# Altium PCB 集成板lite.PcbDoc
Units mil, origin at the board's own origin, x right, y up, seen from the top; angles counter-clockwise.
Board outline 6000 x 4000 mil, 2 copper layers (Top Layer, Bottom Layer); 36 components, 32 nets, 165 pads, 0 vias.
Unrouted connection lines stored in the file: 102.
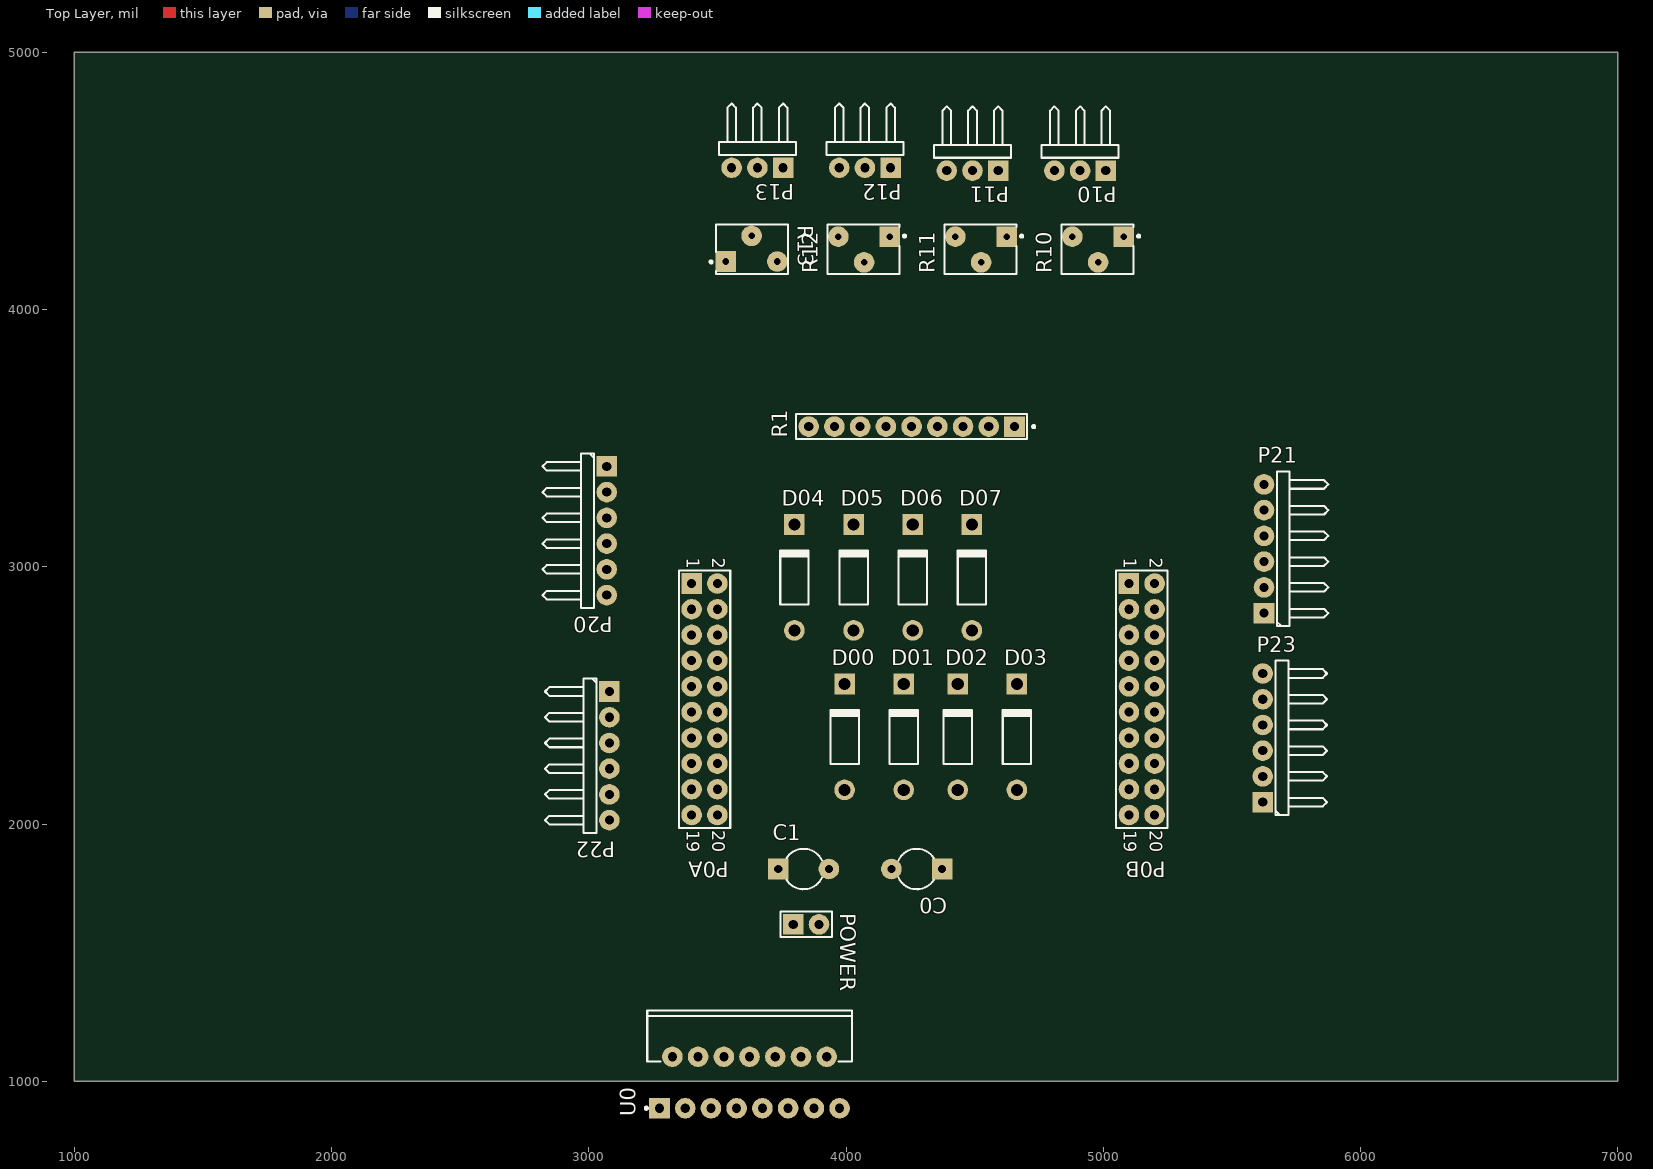
[diagram p0: Top Layer view]
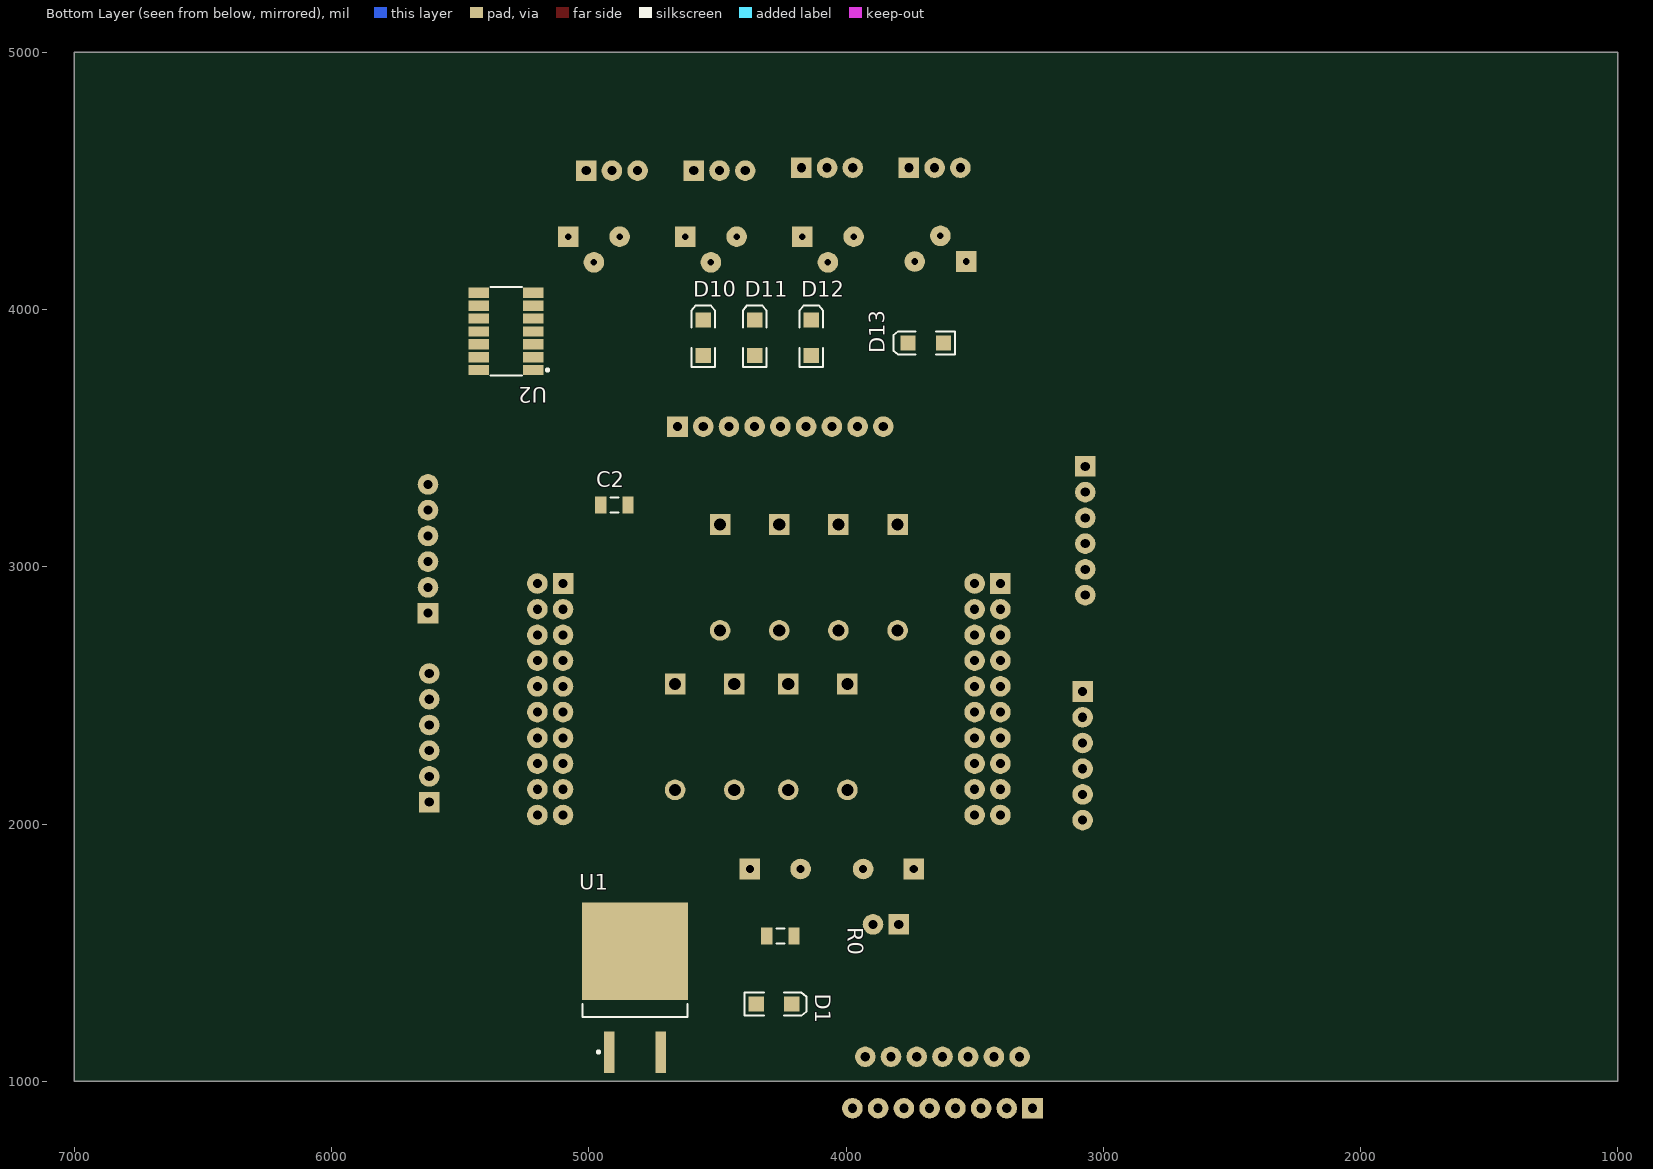
[diagram p1: Bottom Layer view, seen from below]

## Layer stack, top to bottom
Top Solder: solder mask 0.4, Solder Resist, Dk 3.5
Top Layer: signal copper 1.4
Dielectric 1: dielectric 12.6, FR-4, Dk 4.8
Bottom Layer: signal copper 1.4
Bottom Solder: solder mask 0.4, Solder Resist, Dk 3.5

## Board outline
1000,1000 7000,1000 7000,5000 1000,5000

## Design rules (kind name [scope] priority, off if disabled: settings)
Clearance [All] p1: gap=10 ignorepadtopadclearanceinfootprint=FALSE except(0: Arc-Hole Track-Hole SMDPad-Hole THPad-Hole Via-Hole Fill-Hole Poly-Hole Region-Hole Text-Hole)
PolygonConnect [All] p1: connectstyle=Relief reliefconductorwidth=10 reliefentries=4 polygonreliefangle="90 Angle" airgapwidth=10
RoutingLayers [All] p1: top layer_v5=FALSE bottom layer_v5=TRUE
RoutingVias [All] p1: holewidth=28 width=50 viastyle="Through Hole" minholewidth=28 minwidth=50 maxholewidth=28 maxwidth=50
SolderMaskExpansion [All] p1: expansion=4 istentingtop=FALSE
Width [All] p1: maxlimit=50 minlimit=40 preferedwidth=45
29 further rules are at their usual default settings.

## Classes and differential pairs
component class 集成板lite: C0 C1 D00 D01 D1 D02 D03 D04 D05 D06 D07 P0A P0B P10 P11 P12 P13 P20 P21 P22 P23 POWER R0 R10 R11 R12 R13 U0 U1

## Components (designator, comment, footprint, x,y, rotation, side; value= is the part's Value field where it differs from the comment)
C0 "Cap2" CAPR5-4X5 4275,1825 r180 top value=220uF
C1 "Cap2" CAPR5-4X5 3835,1825 r0 top value=220uF
C2 "Cap Semi" C1206 4900,3240 r180 bottom value=100pF
D00 "Diode 1N4007" DO-41 3994.5,2338.46 r90 top
D1 "LED2" 3.2X1.6X1.1 4280,1300 r180 bottom
D01 "Diode 1N4007" DO-41 4224.5,2338.46 r90 top
D02 "Diode 1N4007" DO-41 4434.5,2338.46 r90 top
D03 "Diode 1N4007" DO-41 4664.5,2338.46 r90 top
D04 "Diode 1N4007" DO-41 3799.5,2958.46 r90 top
D05 "Diode 1N4007" DO-41 4029.5,2958.46 r90 top
D06 "Diode 1N4007" DO-41 4259.5,2958.46 r90 top
D07 "Diode 1N4007" DO-41 4489.5,2958.46 r90 top
D10 "LED2" 3.2X1.6X1.1 4555,3890 r90 bottom
D11 "LED2" 3.2X1.6X1.1 4355,3890 r90 bottom
D12 "LED2" 3.2X1.6X1.1 4135,3890 r90 bottom
D13 "LED2" 3.2X1.6X1.1 3690,3870 r0 bottom
P0A "Header 10X2" HDR2X10 3400,2935 r270 top locked
P0B "Header 10X2" HDR2X10 5100,2935 r270 top locked
P10 "Header 3H" HDR1X3H 5010,4540 r180 top
P11 "Header 3H" HDR1X3H 4591.83,4540 r180 top
P12 "Header 3H" HDR1X3H 4173.67,4551.06 r180 top
P13 "Header 3H" HDR1X3H 3755.5,4551.06 r180 top
P20 "Header 6H" HDR1X6H 3070,3390 r270 top
P21 "Header 6H" HDR1X6H 5625,2820 r90 top
P22 "Header 6H" HDR1X6H 3080,2515 r270 top
P23 "Header 6H" HDR1X6H 5620,2085 r90 top
POWER "Header 2" HDR1X2 3795,1610 r0 top
R0 "Res2" C1206 4255,1565 r180 bottom value=1K
R1 "4609X-101-103LF" BOUR-4609X 4255,3545 r180 top
R10 "3266W-1-103LF" FP-3266W-MFG 4977.83,4235 r180 top value=10kΩ
R11 "3266W-1-103LF" FP-3266W-MFG 4522.94,4235 r180 top value=10kΩ
R12 "3266W-1-103LF" FP-3266W-MFG 4068.04,4235 r180 top value=10kΩ
R13 "3266W-1-103LF" FP-3266W-MFG 3635,4235 r0 top value=10kΩ
U0 "L298N" STM-FM-15 3625,995 r90 top
U1 "L7805CD2T-TR" TO-263_M 4820,1363.27 r90 bottom
U2 "LM339DR" FP-D0014A-MFG 5321.3,3915 r0 bottom

## Footprints (in the part's own frame and the unit in brackets; to place one, negate y for a bottom-side part, rotate by r counter-clockwise, add the part's x,y. Pads: shape width x height; smd on the part's side, far side on the other; paste and mask are expansions set on the pad)
3.2X1.6X1.1 [mm] "SMT LED; 2 Flat Leads"
  rect 1.5x1.5 smd: 1(-1.75,0) 2(1.75,0)
  silkscreen extent -2.9,-1.15 3.2,1.15
BOUR-4609X [mil] "THD, 9-Leads, Body 22.81x2.49mm, Pitch 2.54mm"
  rect 80x80 hole 35.43 mask+4: 1(-400,0)
  round 80 hole 35.43 mask+4: 2(-300,0) 3(-200,0) 4(-100,0) 5(0,0) 6(100,0) 7(200,0) 8(300,0) 9(400,0)
  silkscreen extent -480,-49 449,49, body extent -448,-49 450,49, height 200
C1206 [mm] "Chip Capacitor, Body 3.2x1.6mm, IPC High Density"
  rect 1.1x1.7 smd: 1(-1.35,0) 2(1.35,0)
  silkscreen extent -0.4,-0.75 0.4,0.75, body extent -1.7,-0.9 1.7,0.9, height 1.3
CAPR5-4X5 [mil] "Capacitor; 2 Leads"
  rect 80x80 hole 31.5: 1(-98.43,0)
  round 80 hole 31.5: 2(98.43,0)
  silkscreen extent -66,-79 72,79
DO-41 [mil] "Diode, Axial; Body 5.2 x 2.7 mm (LxDia. max), Lead Dia. 0.86 mm (max)"
  round 80 hole 47.24: 1(-205.91,0)
  rect 80x80 hole 47.24: 2(205.91,0)
  silkscreen extent -104,-55 108,55
FP-3266W-MFG [mm]
  rect 2.032x2.032 hole 0.65 paste-1000 mask+0: 1(-2.595,-1.23)
  round 2.032 hole 0.65 paste-1000 mask+0: 2(-0.055,1.31) 3(2.485,-1.23)
  silkscreen extent -4.18,-2.44 3.54,2.44, body extent -3.64,-2.54 3.64,2.54, height 0.25
FP-D0014A-MFG [mil]
  rect 80x40 smd paste-39370.1 mask+0: 1(-106.3,150) 2(-106.3,100) 3(-106.3,50) 4(-106.3,0) 5(-106.3,-50) 6(-106.3,-100) 7(-106.3,-150) 8(106.3,-150) 9(106.3,-100) 10(106.3,-50) 11(106.3,0) 12(106.3,50) 13(106.3,100) 14(106.3,150)
  silkscreen extent -165,-172 61,172, body extent -118,-170 118,170, height 69
HDR1X2 [mil] "Connector; Header; 2 Position"
  rect 80x80 hole 35.43: 1(0,0)
  round 80 hole 35.43: 2(100,0)
  silkscreen extent -50,-50 150,50
HDR1X3H [mil] "Connector; Header; 3 Position; Right Angle"
  rect 80x80 hole 35.43: 1(0,0)
  round 80 hole 35.43: 2(100,0) 3(200,0)
  silkscreen extent -50,-250 250,-50
HDR1X6H [mil] "Connector; Header; 6 Position; Right Angle"
  rect 80x80 hole 35.43: 1(0,0)
  round 80 hole 35.43: 2(100,0) 3(200,0) 4(300,0) 5(400,0) 6(500,0)
  silkscreen extent -50,-250 550,-50
HDR2X10 [mil] "Connector; Header; 10x2 Position"
  rect 80x80 hole 35.43: 1(0,0)
  round 80 hole 35.43: 2(0,100) 3(100,0) 4(100,100) 5(200,0) 6(200,100) 7(300,0) 8(300,100) 9(400,0) 10(400,100) 11(500,0) 12(500,100) 13(600,0) 14(600,100) 15(700,0) 16(700,100) 17(800,0) 18(800,100) 19(900,0) 20(900,100)
  silkscreen extent -50,-50 950,150
STM-FM-15 [mil] "FM, 15-Leads, Body 20.2x5mm, Pitch 1.27mm"
  rect 80x80 hole 35.43: 1(-100,350)
  round 80 hole 35.43: 2(100,300) 3(-100,250) 4(100,200) 5(-100,150) 6(100,100) 7(-100,50) 8(100,0) 9(-100,-50) 10(100,-100) 11(-100,-150) 12(100,-200) 13(-100,-250) 14(100,-300) 15(-100,-350)
  silkscreen extent -105,-398 279,406, body extent -110,-398 279,398, height 827
TO-263_M [mm] "D2-PAK, 4-Leads, Body 9.2x10.2mm, Pitch 2.54mm, Lead Span 15.4mm, IPC Low Density"
  rect 4.1x1.05 smd: 1(-6.35,2.54) 3(-6.35,-2.54)
  rect 9.6x10.45 smd: 4(3.6,0)
  silkscreen extent -6.47,-5.2 -1.6,5.2, body extent -2.9,-5.2 6.45,5.2, height 4.6

## Part data
C0 C1: "Capacitor", PackageDescription="Capacitor; 2 Leads", PackageReference=CAPR5-4X5, Published=23-Sep-2002, Publisher="Altium Limited"
C2: "Capacitor (Semiconductor SIM Model)", LatestRevisionDate=29-May-2009, LatestRevisionNote="IPC-7351 Footprint Added.", PackageDescription="Chip Capacitor", PackageReference=C1206, Published=8-Jun-2000, Publisher="Altium Limited"
D00 D01 D02 D03 D04 D05 D06 D07: "1 Amp General Purpose Rectifier", Code_JEDEC=DO-204-AL, ComponentLink1Description="Manufacturer Link", ComponentLink1URL=http://www.fairchildsemi.com/, ComponentLink2Description=Datasheet, ComponentLink2URL=http://www.fairchildsemi.com/ds/1N%2F1N4001.pdf, DatasheetVersion=1998, LatestRevisionDate=17-Jul-2002, LatestRevisionNote="Re-released for DXP Platform.", PackageDescription="Diode, Axial; Body 5.2 x 2.7 mm (LxDia. max), Lead Dia. 0.86 mm (max)", PackageReference=DO-41, PackageVersion=Aug-1999, Published=8-Jun-2000, Publisher="Altium Limited"
D1 D10 D11 D12 D13: "Typical RED, GREEN, YELLOW, AMBER GaAs LED", LatestRevisionDate=17-Jul-2002, LatestRevisionNote="Re-released for DXP Platform.", PackageDescription="SM LED; 2 Flat Leads", PackageReference=3.2X1.6X1.1, PackageVersion=Feb-2002, Published=8-Jun-2000, Publisher="Altium Limited"
P0A P0B: "Header, 10-Pin, Dual row", LatestRevisionDate=17-Jul-2002, LatestRevisionNote="Re-released for DXP Platform.", Publisher="Altium Limited"
P10 P11 P12 P13: "Header, 3-Pin, Right Angle", LatestRevisionDate=17-Jul-2002, LatestRevisionNote="Re-released for DXP Platform.", Publisher="Altium Limited"
P20 P21 P22 P23: "Header, 6-Pin, Right Angle", LatestRevisionDate=17-Jul-2002, LatestRevisionNote="Re-released for DXP Platform.", Publisher="Altium Limited"
POWER: "Header, 2-Pin", LatestRevisionDate=17-Jul-2002, LatestRevisionNote="Re-released for DXP Platform.", Publisher="Altium Limited"
R0: "Resistor", LatestRevisionDate=17-Jul-2002, LatestRevisionNote="Re-released for DXP Platform.", PackageDescription="Axial Device, Thru-Hole; 2 Leads; 0.4 in Pin Spacing", PackageReference=AXIAL-0.4, Published=8-Jun-2000, Publisher="Altium Limited"
R1: library part CMP-2000-05605-1, "Resistor, Network, 1.13 W, 10 kOhm, -55 to 125 degC, 9-Pin THD, RoHS, Bulk", Manufacturer=Bourns, Number of Resistors=8, Package Description="9-Pin Through Hole Device, Body 22.81 x 2.49 mm, Pitch 2.54 mm", Package Reference=4609X, Package Type=SIP, Power, Rating=1.13W, Resistance=10kilohms, Temperature, Operating=-55to+125°C, Tolerance=±2%, Brand/Series=4600XSeries, Circuit=BussedArray, Datasheet URL=https://datasheet.ciiva.com/11807/0900766b8069ccfd-11807021.pdf, Datasheet Version=04/2010, Dimensions=0.898x0.098x0.2(22.81x2.49x5.08)LxWxHin.(mm), Manufacturer URL=http://www.bourns.com/, Mounting Technology=ThroughHole, Mounting Type=ThroughHole, Number of Terminals=9
R10 R11 R12 R13: library part CMP-07234-000016-1, "TRIMMER 10K OHM 0.25W PC PIN TOP", Manufacturer=Bourns, Package=3266W, Power Rating=0.25W, Resistance=10kΩ, Temperature="-55°C to +125°C", Temperature Coefficient=100ppm/°C, Temperature Range High=+125°C, Temperature Range Low=-55°C, Tolerance=10%, Automotive=No, Category=Res, ComponentLink2Description=Datasheet, ComponentLink2URL=https://www.bourns.com/docs/Product-Datasheets/3266.pdf, Composition=Cermet, Device Class L1="Passive Components", Device Class L2=Resistors, Device Class L3="Variable Resistors and Potentiometers", Digikey Description="TRIMMER 10K OHM 0.25W PC PIN TOP", Height=9.02mm, Lead Free=Yes, Manufacturer Part Number=3266W-1-103LF, Mouser Description="Trimmer Resistors - Through Hole 1/4 10Kohms 10% SQ W/Standoff Sealed", Octopart=https://octopart.com/3266w-1-103lf-bourns-81445, RoHS=TRUE, Series=3266, Standoff Height=0.43mm
U0: library part CMP-2000-06526-1, "Dual Full-Bridge Driver, 4.8 to 46 V, -40 to 150 degC, 15-Pin FM (MW 15L), RoHS, Tube", Driver Case Style=Multiwatt, Manufacturer=STMicroelectronics, Operating Temperature Max=130°C, Operating Temperature Min=-25°C, Output Current=2A, Output Voltage=46V, Package Description="15-Pin Flange Mount, Body 5 x 19.6 mm, Pitch 1.27 mm", Package Reference=FM-15, PartNumber=L298, Supply Voltage Max=7V, Supply Voltage Min=4.5V, Automotive Qualification Standard=-, Datasheet URL=https://datasheet.ciiva.com/15109/getdatasheetpartid-50682-15109332.pdf, Datasheet Version=01/2000, Manufacturer URL=http://www.st.com/, Motor Type=FullBridge, Mounting Technology=ThroughHole, MSL=-, No. of Outputs=4Outputs, No. of Pins=15Pins, Packaging=Each, Product Range=-, SVHC=NoSVHC(17-Dec-2015)
U1: library part CMP-0244-00213-1, "Positive Voltage Regulator, 3-Pin D2PAK, Tape and Reel", ComponentLink1Description="Manufacturer URL", ComponentLink1URL=http://www.st.com, ComponentLink2Description=Datasheet, ComponentLink2URL=http://www.st.com/internet/com/TECHNICAL_RESOURCES/TECHNICAL_LITERATURE/DATASHEET/CD00000444.pdf, DatasheetVersion=16/11/2011, PackageDescription="3-Pin Transistor Outline Package 2.54 mm Pitch, 15.4 mm Lead Span (D2PAK)", PackageReference=TO-263, PackageVersion=2011
U2: library part CMP-04896-000028-1, "IC QUAD DIFF COMP 14-SOIC", Input Bias Current=-0.025uA, Input Offset Voltage=2mV, Manufacturer="Texas Instruments", Max Dual Supply Voltage=18V, Max Junction Temp=+70°C, Max Supply Voltage=30V, Min Dual Supply Voltage=1V, Min Supply Voltage=2V, Nominal Supply Current=0.8mA, Output Current Per Channel=6mA, Package=D0014A, Temperature="0°C to +70°C", Temperature Range Low=0°C, Automotive=No, Category=IC, ComponentLink2Description=Datasheet, ComponentLink2URL=http://www.ti.com/lit/ds/symlink/lm339.pdf, Device Class L1="Integrated Circuits (ICs)", Device Class L2="Linear ICs", Device Class L3=Comparators, Digikey Description="IC QUAD DIFF COMP 14-SOIC", Height=1.75mm, Ipc Land Pattern Name=SOIC127P600X175-14, Lead Free=Yes, Manufacturer Part Number=LM339DR, Mouser Description="Analog Comparators Quad Differential", Number Of Channels=4, Octopart=https://octopart.com/lm339dr-texas+instruments-45532, Response Time=1.3us, RoHS=TRUE, Standoff Height=0.1mm, Temperature Range High=+70°C

## Nets (pads, with @x,y where several pads share a name; then routed paths per layer and width w, separated by ;. In a path a pad name is that pad's centre, name@x,y a point inside that pad or via, vN(x,y) a via of type N, cw(c..) or ccw(c..) an arc to the next point about the centre after c; other vN are vias at no path point)
+5: C0.1 C1.1 C2.1 D00.2 D01.2 D02.2 D03.2 P0A.2 P10.3 P11.3 P12.3 P13.3 P20.5 P21.5 P22.5 P23.5 R0.2 R1.1 R10.1 R11.1 R12.1 R13.1 U0.9 U1.3 U2.3
+12: POWER.1 U0.4 U1.1
E1A: P0B.9 P20.4
E2A: P0B.11 P21.4
GND: C0.2 C1.2 C2.2 D1.2 D04.1 D05.1 D06.1 D07.1 P0A.4 P0B.2 P10.1 P11.1 P12.1 P13.1 P20.2 P21.2 P22.2 P23.2 POWER.2 R10.3 R11.3 R12.3 R13.3 U0.1 U0.8 U0.15 U1.4 U2.12
IN1: P0B.17 U0.5
IN2: P0B.19 U0.7
IN3: P0A.18 U0.10
IN4: P0A.20 U0.12
IR0: D10.2 P0A.12 R1.2 U2.1
IR1: D11.2 P0A.10 R1.3 U2.2
IR2: D12.2 P0A.8 R1.4 U2.14
IR3: D13.2 P0A.6 R1.5 U2.13
M0+: D00.1 D04.2 P20.1 P22.1 U0.2
M0-: D01.1 D05.2 P20.6 P22.6 U0.3
M1+: D02.1 D06.2 P21.1 P23.1 U0.13
M1-: D03.1 D07.2 P21.6 P23.6 U0.14
NetD1_1: D1.1 R0.1
NetD10_1: D10.1 R1.6
NetD11_1: D11.1 R1.7
NetD12_1: D12.1 R1.8
NetD13_1: D13.1 R1.9
NetP10_2: P10.2 U2.7
NetP11_2: P11.2 U2.5
NetP12_2: P12.2 U2.9
NetP13_2: P13.2 U2.11
NetR10_2: R10.2 U2.6
NetR11_2: R11.2 U2.4
NetR12_2: R12.2 U2.8
NetR13_2: R13.2 U2.10
PWM1: P0B.1 U0.6
PWM2: P0B.4 U0.11
pads on no net: P0A.1 P0A.3 P0A.5 P0A.7 P0A.9 P0A.11 P0A.13 P0A.14 P0A.15 P0A.16 P0A.17 P0A.19 P0B.3 P0B.5 P0B.6 P0B.7 P0B.8 P0B.10 P0B.12 P0B.13 P0B.14 P0B.15 P0B.16 P0B.18 P0B.20 P20.3 P21.3 P22.3 P22.4 P23.3 P23.4

## Silkscreen, mask and mechanical layers (free items; w line width, h text height)
Mechanical 1:
  lines w10: 3140,1480 5450,1480 5450,4390 3140,4390 3140,1480

## Text inside footprints (layer, text, board x,y; h text height)
P0A: Top Overlay "20" at 3480,1975 h50 r270; Top Overlay "19" at 3380,1975 h50 r270; Top Overlay "1" at 3380,3035 h50 r270; Top Overlay "2" at 3480,3035 h50 r270
P0B: Top Overlay "20" at 5180,1975 h50 r270; Top Overlay "19" at 5080,1975 h50 r270; Top Overlay "1" at 5080,3035 h50 r270; Top Overlay "2" at 5180,3035 h50 r270